# Altium PCB RGB_Lamp.PcbDoc
Units mil, origin at the board's own origin, x right, y up, seen from the top; angles counter-clockwise.
Board outline 6000 x 4000 mil, 2 copper layers (Top Layer, Bottom Layer); 22 components, 18 nets, 59 pads, 0 vias.
Unrouted connection lines stored in the file: 38.
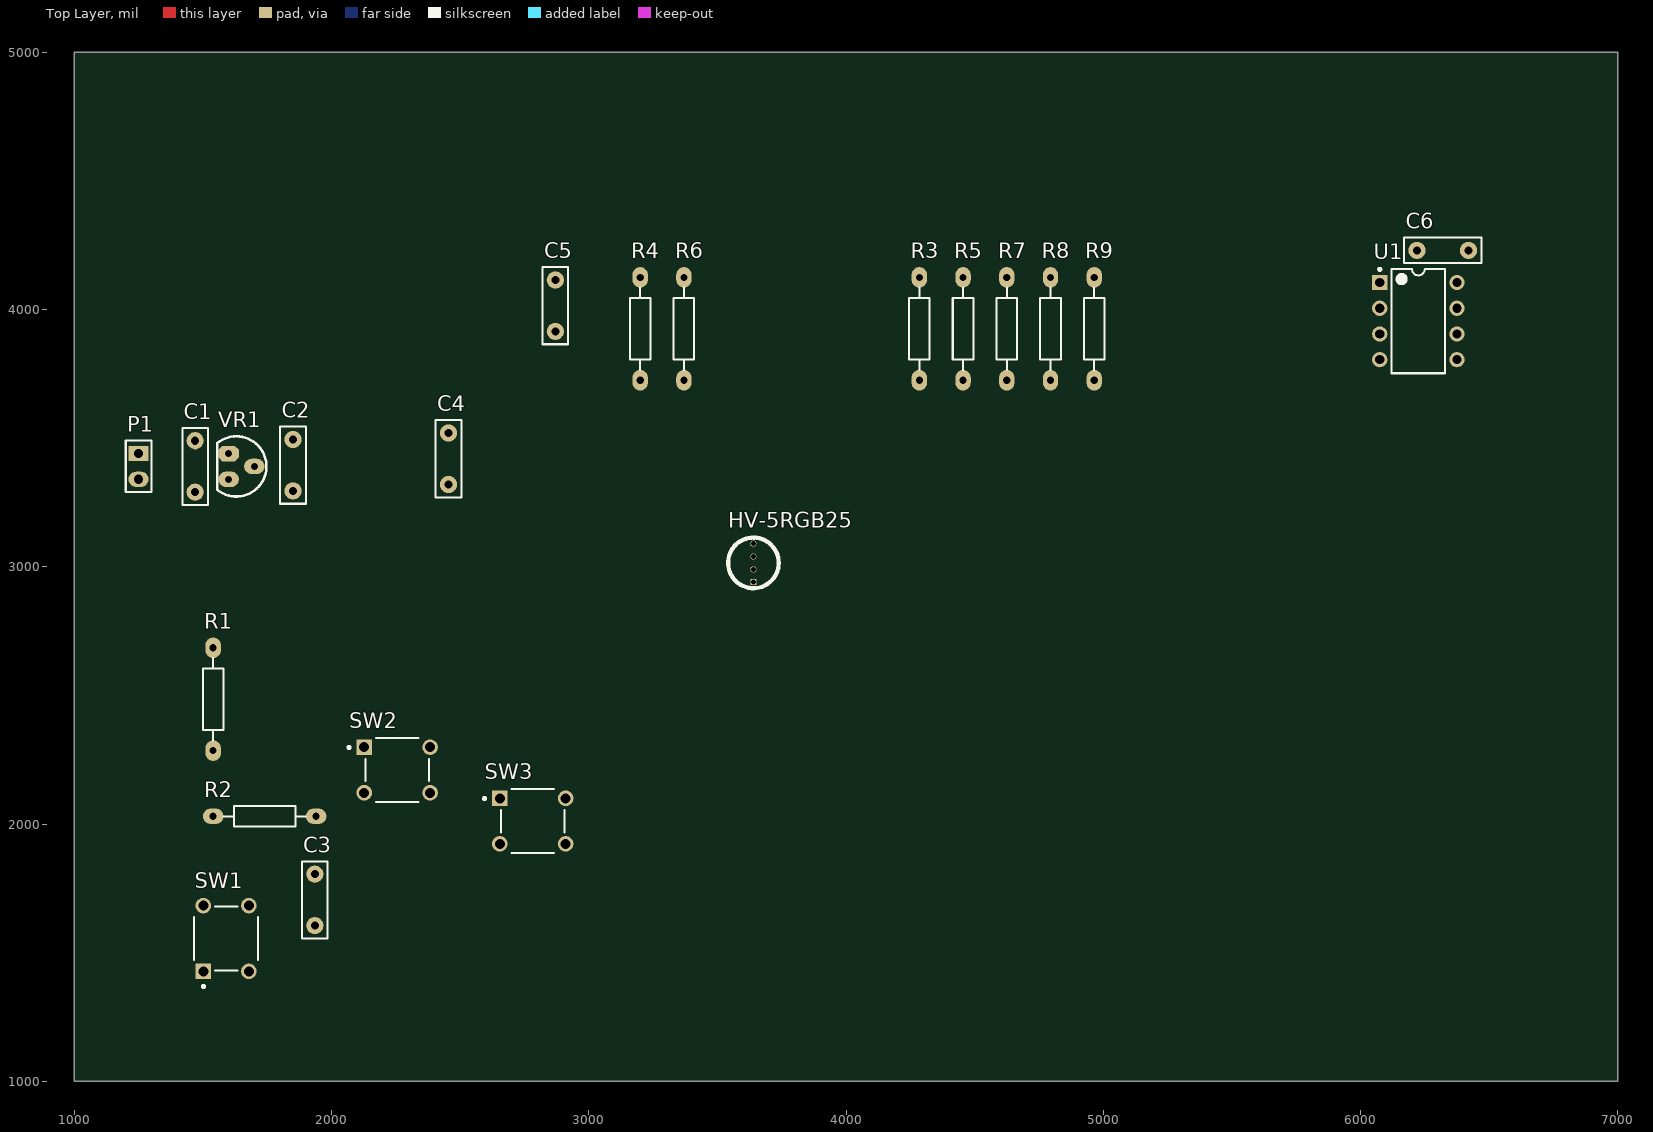
[diagram p0: Top Layer view]
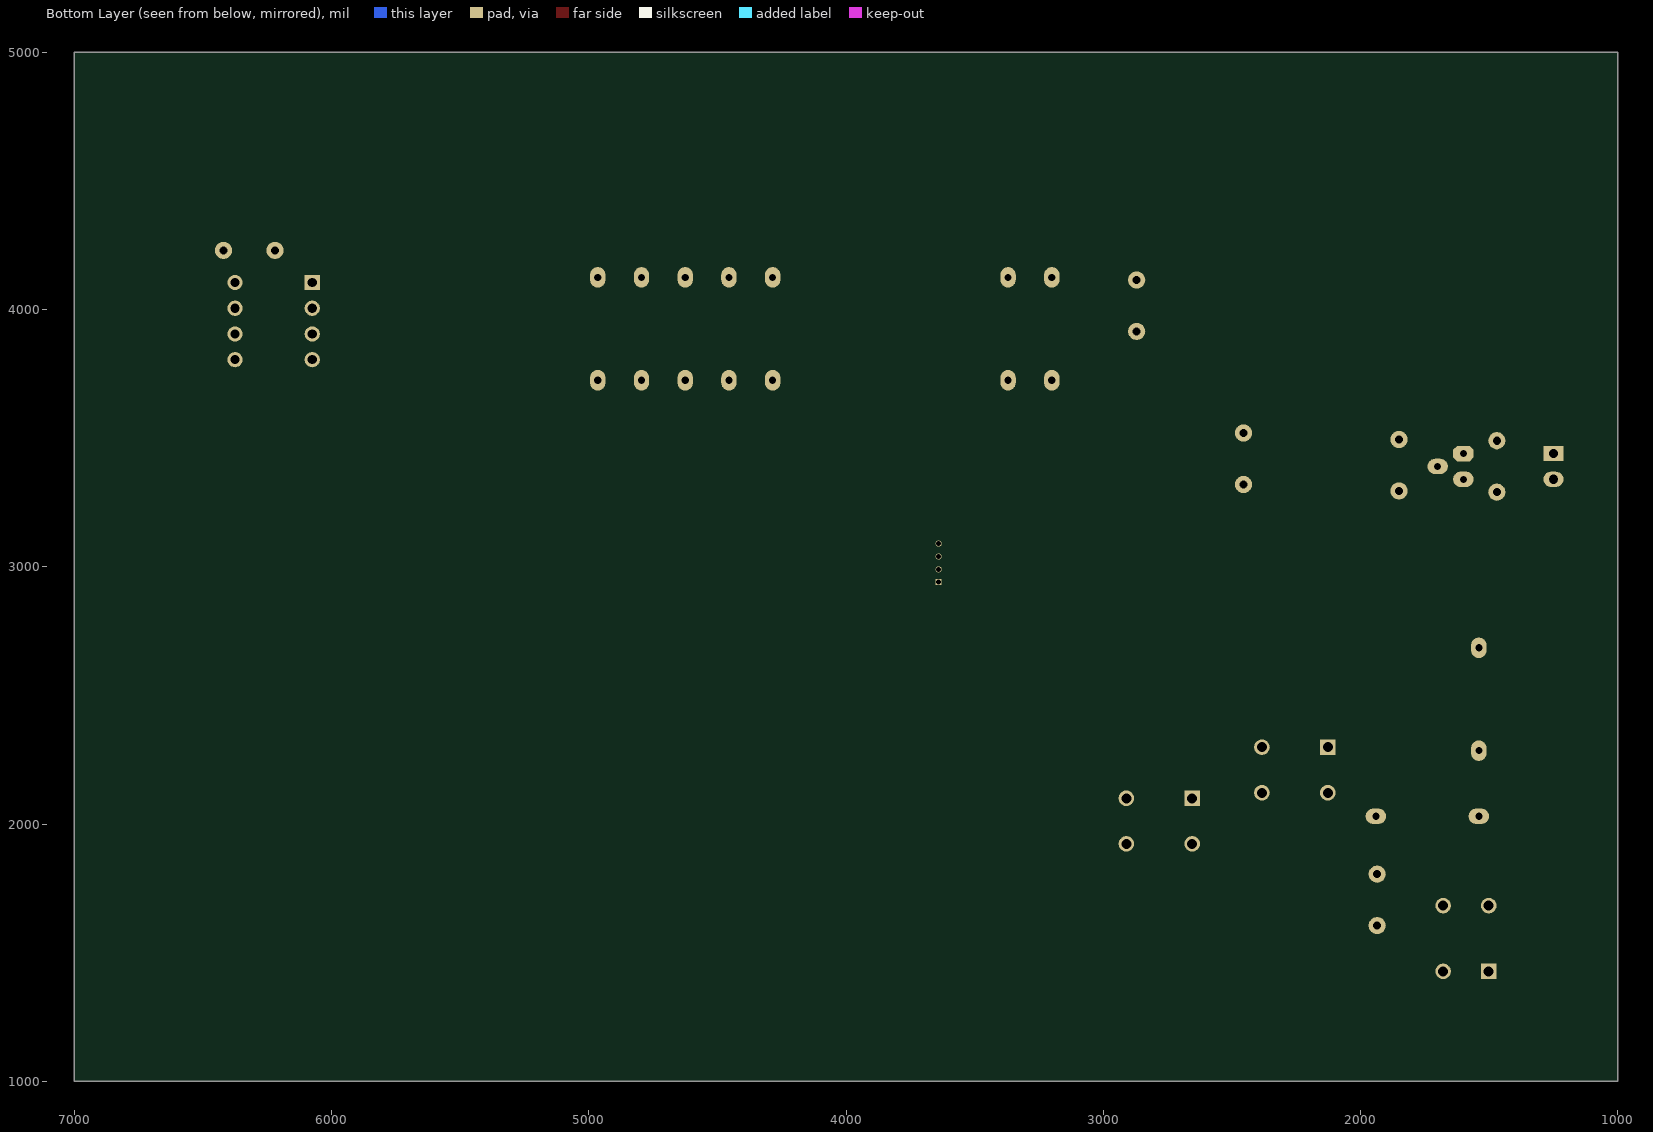
[diagram p1: Bottom Layer view, seen from below]

## Layer stack, top to bottom
Top Solder: solder mask 0.4, Solder Resist, Dk 3.5
Top Layer: signal copper 1.4
Dielectric 1: dielectric 12.6, FR-4, Dk 4.8
Bottom Layer: signal copper 1.4
Bottom Solder: solder mask 0.4, Solder Resist, Dk 3.5

## Board outline
1000,1000 7000,1000 7000,5000 1000,5000

## Design rules (kind name [scope] priority, off if disabled: settings)
Clearance [All] p1: gap=10 ignorepadtopadclearanceinfootprint=FALSE except(0: Arc-Hole Track-Hole SMDPad-Hole THPad-Hole Via-Hole Fill-Hole Poly-Hole Region-Hole Text-Hole)
PolygonConnect [All] p1: connectstyle=Relief reliefconductorwidth=10 reliefentries=4 polygonreliefangle="90 Angle" airgapwidth=10
RoutingVias [All] p1: holewidth=28 width=50 viastyle="Through Hole" minholewidth=28 minwidth=50 maxholewidth=28 maxwidth=50
SolderMaskExpansion [All] p1: expansion=4 istentingtop=FALSE
Width [All] p1: maxlimit=10 minlimit=10 preferedwidth=10
30 further rules are at their usual default settings.

## Components (designator, comment, footprint, x,y, rotation, side; value= is the part's Value field where it differs from the comment)
C1 "330nF" ece-RAD0.2 1470,3290 r90 top
C2 "100nF" ece-RAD0.2 1850,3495 r270 top
C3 "100nF" ece-RAD0.2 1935,1805 r270 top
C4 "100nF" ece-RAD0.2 2455,3320 r90 top
C5 "100nF" ece-RAD0.2 2870,3915 r90 top
C6 "100nF" ece-RAD0.2 6420,4230 r180 top
HV-5RGB25 "RGB_LED" HV-5RGB25 3640,2940 r90 top
P1 "Batteries" ece-HDR1X2 1250,3440 r270 top
R1 "10k" ece-AXIAL0.4 1540,2485 r90 top
R2 "10k" ece-AXIAL0.4 1740,2030 r0 top
R3 "10k" ece-AXIAL0.4 4285,3925 r90 top
R4 "10k" ece-AXIAL0.4 3200,3925 r90 top
R5 "10k" ece-AXIAL0.4 4455,3925 r90 top
R6 "10k" ece-AXIAL0.4 3370,3925 r90 top
R7 "82" ece-AXIAL0.4 4625,3925 r90 top
R8 "150" ece-AXIAL0.4 4795,3925 r90 top
R9 "82" ece-AXIAL0.4 4965,3925 r90 top
SW1 "3-1825910-1" FP-3-1825910-1-MFG 1590,1555 r90 top
SW2 "3-1825910-1" FP-3-1825910-1-MFG 2255,2210 r0 top
SW3 "3-1825910-1" FP-3-1825910-1-MFG 2782.05,2011.42 r0 top
U1 "ATtiny85-20PU" 8P3 6225,3955 r0 top
VR1 "AS78L05ZTR-E1" ece-TO-92 1600,3440 r270 top

## Footprints (in the part's own frame and the unit in brackets; to place one, negate y for a bottom-side part, rotate by r counter-clockwise, add the part's x,y. Pads: shape width x height; smd on the part's side, far side on the other; paste and mask are expansions set on the pad)
8P3 [mm] "DIP, 8-Pin, Row Spacing 7.62 mm, Pitch 2.54 mm"
  rect 1.5x1.5 hole 0.9: 1(-3.81,3.81)
  round 1.5 hole 0.9: 2(-3.81,1.27) 3(-3.81,-1.27) 4(-3.81,-3.81) 5(3.81,-3.81) 6(3.81,-1.27) 7(3.81,1.27) 8(3.81,3.81)
  silkscreen extent -3.93,-5.15 2.65,5.23, body extent -3.6,-5.15 3.6,5.15, height 5.33
ece-AXIAL0.4 [mil]
  oval 80x60 hole 27.56: 1(-200,0) 2(200,0)
  silkscreen extent -160,-40 160,40
ece-HDR1X2 [mm] "Header 2 way"
  rect 1.5x2 hole 0.9: 1(0,0)
  oval 1.5x2 hole 0.9: 2(2.54,0)
  silkscreen extent -1.27,-1.27 3.81,1.27
ece-RAD0.2 [mm]
  round 1.7 hole 0.8: 1(0,0) 2(5.08,0)
  silkscreen extent -1.27,-1.27 6.35,1.27
ece-TO-92 [mil]
  oct 60x80 hole 27.56: 1(0,0)
  oval 60x80 hole 27.56: 2(50,100) 3(100,0)
  silkscreen extent -67,-45 167,147
FP-3-1825910-1-MFG [mm]
  rect 1.54x1.54 hole 0.99 paste-1000 mask+0: 1(-3.25,2.25)
  round 1.54 hole 0.99 paste-1000 mask+0: 2(3.25,2.25) 3(-3.25,-2.25) 4(3.25,-2.25)
  silkscreen extent -4.87,-3.15 3.15,3.15, body extent -4.12,-3.24 4.12,3.24, height 0.25
HV-5RGB25 [mm]
  rect 0.6x0.6 hole 0.5: 1(0,0)
  round 0.6 hole 0.5: 2(1.27,0) 3(2.54,0) 4(3.81,0)
  silkscreen extent -0.59,-2.5 4.4,2.5

## Part data
C1 C2 C3 C4 C5 C6: library part CAP, "Capacitor Non Polarised Through Hole"
P1: library part "Header 2", "Header, 2-Pin", LatestRevisionDate=17-Jul-2002, LatestRevisionNote="Re-released for DXP Platform.", Publisher="Altium Limited"
R1 R2 R3 R4 R5 R6 R7 R8 R9: library part Res2, "Resistor", LatestRevisionDate=17-Jul-2002, LatestRevisionNote="Re-released for DXP Platform.", PackageReference=AXIAL-0.4, Published=8-Jun-2000, Publisher="Altium Limited"
SW1 SW2 SW3: library part CMP-03407-000001-1, "SWITCH TACTILE SPST-NO 0.05A 24V", Contact Current Rating=50mA, Contact Resistance=100mΩ, Manufacturer="TE Connectivity", Operating Force=160gf, Package=0, Temperature="-35°C to +85°C", Temperature Range High=+85°C, Temperature Range Low=-35°C, Automotive=No, Category=Switch, ComponentLink2Description=Datasheet, ComponentLink2URL=https://www.te.com/commerce/DocumentDelivery/DDEController?Action=srchrtrv&DocNm=1825910&DocType=Customer+Drawing&DocLang=English, Device Class L1=Electromechanical, Device Class L2=Switches, Device Class L3="Tactile Switches", Digikey Description="SWITCH TACTILE SPST-NO 0.05A 24V", Electromechanical Life=100000Cycles, Height=17.3mm, Lead Free=Yes, Manufacturer Part Number=3-1825910-1, Mount="Through Hole", Octopart=https://octopart.com/3-1825910-1-te+connectivity-46506874, RoHS=TRUE, Throw Configuration=SPST-NO
U1: library part CMP-0093-00032-2, "8-bit AVR Microcontroller, 20MHz, 2.7-5.5V, 8K Flash, 512 Bytes EEPROM, 512 Bytes SRAM, Industrial Grade (-40°C to 85°C), 8-Lead PDIP, Pb-Free", Code_JEDEC=MS-001-BA, ComponentLink1Description="Manufacturer URL", ComponentLink1URL=http://www.atmel.com/, ComponentLink2Description="ATtiny25/45/85 Datasheet", ComponentLink2URL=http://www.atmel.com/dyn/resources/prod_documents/doc2586.pdf, ComponentLink3Description="ATtiny25/45/85 Summary", ComponentLink3URL=http://www.atmel.com/dyn/resources/prod_documents/2586S.pdf, DatasheetVersion="revN, Apr-2011", PackageDescription="8-Lead, 0.300\" Wide Body, Plastic Dual In-Line Package (PDIP)", PackageReference=8P3, PackageVersion="revB, Jan-2002", RevisionNote="DatasheetVersion updated. URLs added."
VR1: library part VoltRegSmall, "Voltage Regulator"

## Nets (pads, with @x,y where several pads share a name; then routed paths per layer and width w, separated by ;. In a path a pad name is that pad's centre, name@x,y a point inside that pad or via, vN(x,y) a via of type N, cw(c..) or ccw(c..) an arc to the next point about the centre after c; other vN are vias at no path point)
COLOR: C4.1 R4.2 U1.7
GND: C1.2 C2.2 C6.2 HV-5RGB25.3 P1.1 SW1.1 SW2.1 SW3.1 U1.4 VR1.2
NetC3_2: C3.2 SW1.2
NetC4_2: C4.2 SW2.2
NetC5_2: C5.2 SW3.2
NetHV-5RGB25_1: HV-5RGB25.1 R9.1
NetHV-5RGB25_2: HV-5RGB25.2 R8.1
NetHV-5RGB25_4: HV-5RGB25.4 R7.1
NetR1_1: R1.1 R2.1 SW1.4
NetR3_1: R3.1 R4.1 SW2.4
NetR5_1: R5.1 R6.1 SW3.4
ON/OFF: C3.1 R2.2 U1.2
PWM_B: R9.2 U1.3
PWM_G: R7.2 U1.6
PWM_R: R8.2 U1.5
RESET: C5.1 R6.2 U1.1
Vbatt: C1.1 P1.2 VR1.3
VCC: C2.1 C6.1 R1.2 R3.2 R5.2 U1.8 VR1.1
pads on no net: SW1.3 SW2.3 SW3.3